# Altium PCB FPC-v4.2.PcbDoc
Units mil, origin at the board's own origin, x right, y up, seen from the top; angles counter-clockwise.
Board outline 1191.42 x 2806.71 mil, 2 copper layers (Top Layer, Bottom Layer); 1 components, 6 nets, 17 pads, 0 vias.
Unrouted connection lines stored in the file: 9.
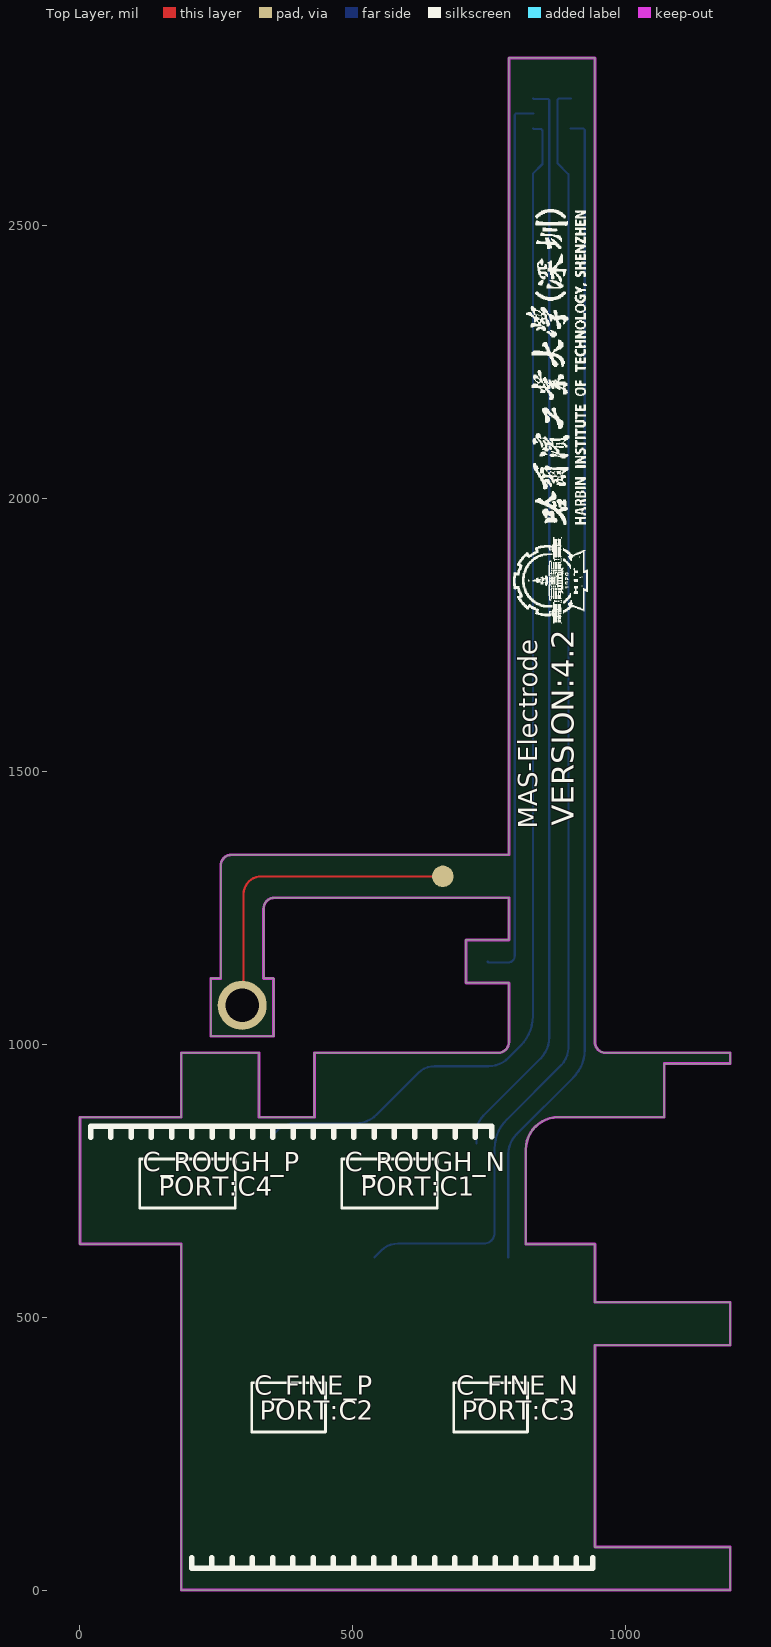
[diagram p0: Top Layer view]
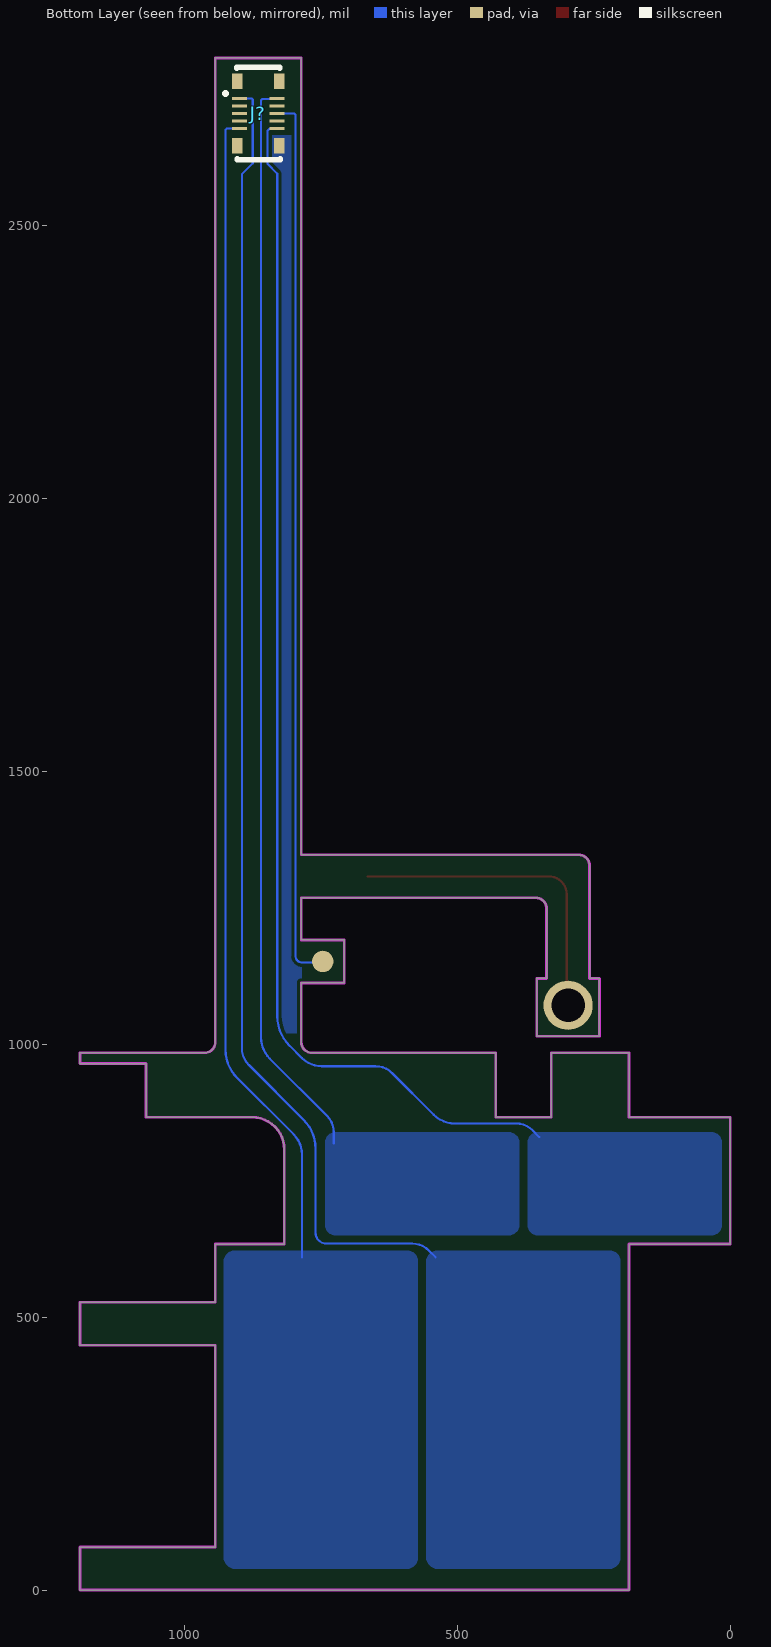
[diagram p1: Bottom Layer view, seen from below]

## Layer stack, top to bottom
Top Solder: solder mask 0.4, Solder Resist, Dk 3.5
Top Layer: signal copper 1.4
Dielectric 1: dielectric 12.6, FR-4, Dk 4.8
Bottom Layer: signal copper 1.4
Bottom Solder: solder mask 0.4, Solder Resist, Dk 3.5

## Board outline
0.25,634.11 185.78,634.11 185.78,0.25 1191.67,0.25 1191.67,78.99 943.64,78.99 943.64,448.65 1191.67,448.65 1191.67,527.39 943.64,527.39 943.64,634.11 817.16,634.11 817.16,807.34 cw(c876.22,807.34) 876.22,866.39 1070.52,866.39 1070.52,964.82 1191.67,964.82 1191.67,984.5 963.32,984.5 cw(c963.32,1004.19) 943.64,1004.19 943.64,2806.96 786.16,2806.96 786.16,1347.08 277.7,1347.08 ccw(c277.7,1327.39) 258.02,1327.39 258.02,1120.7 240,1120.7 240,1015 355,1015 355,1120.7 336.76,1120.7 336.76,1248.65 cw(c356.44,1248.65) 356.44,1268.34 786.16,1268.34 786.16,1191.19 707.42,1191.19 707.42,1112.45 786.16,1112.45 786.16,1004.19 cw(c766.47,1004.19) 766.47,984.5 429.97,984.5 429.97,866.39 328.39,866.39 328.39,984.5 185.78,984.5 185.78,866.39 0.25,866.39

## Design rules (kind name [scope] priority, off if disabled: settings)
Clearance [All] p1: gap=6 ignorepadtopadclearanceinfootprint=FALSE
PlaneConnect [All] p1: planeconnectstyle=Direct reliefexpansion=20 reliefentries=4 reliefconductorwidth=10 reliefairgap=10
PolygonConnect [All] p1: connectstyle=Direct reliefconductorwidth=10 reliefentries=4 polygonreliefangle="90 Angle" airgapwidth=10
RoutingVias [All] p1: holewidth=28 width=50 viastyle="Through Hole" minholewidth=28 minwidth=50 maxholewidth=28 maxwidth=50
SolderMaskExpansion [All] p1: expansion=4 istentingtop=FALSE
Width [All] p1: maxlimit=10 minlimit=4 preferedwidth=4
29 further rules are at their usual default settings.

## Components (designator, comment, footprint, x,y, rotation, side; value= is the part's Value field where it differs from the comment)
J? "BM24-10DP/2-0.35V(51)" CONN-SMD_BM24-10DP-2-0.35V-51 865,2705 r270 bottom

## Footprints (in the part's own frame and the unit in brackets; to place one, negate y for a bottom-side part, rotate by r counter-clockwise, add the part's x,y. Pads: shape width x height; smd on the part's side, far side on the other; paste and mask are expansions set on the pad)
CONN-SMD_BM24-10DP-2-0.35V-51 [mm] "板对板连接器"
  rect 0.15x0.69 smd: 1(-0.7,-0.875) 2(-0.35,-0.875) 3(0,-0.875) 4(0.35,-0.875) 5(0.7,-0.875) 6(0.7,0.875) 7(0.35,0.875) 8(0,0.875) 9(-0.35,0.875) 10(-0.7,0.875)
  rect 0.73x0.49 smd: 11(1.5,0.975) 12(1.5,-0.975) 13(-1.5,-0.975) 14(-1.5,0.975)
  silkscreen extent -2.16,-1.55 2.16,1.02, body extent -2.17,-1 2.15,1.02, height 0.64

## Part data
J?: "板对板连接器", Current Rating (Max)=5A, JLCPCB Part Class="Extended Part", LCSC Part Name=BTB板对板,BM24系列,0.35间距,10PIN公座, Manufacturer=HRS(广濑), Operating Temperature Range=-40℃~+85℃, Add into BOM=yes, Convert to PCB=yes, Device=BM24-10DP/2-0.35V(51), Gender=公, Manufacturer Part=BM24-10DP/2-0.35V(51), Mounting Style=立贴, Name=BM24-10DP/2-0.35V(51), Number of Pins=10, Number of Rows=2, Pitch=0.35mm, Supplier=LCSC, Supplier Footprint=SMD,P=0.35mm, Supplier Part=C424554, Symbol=BM24-10DP/2-0.35V(51)

## Free pads (board coordinates)
  round 90 hole 61.02: 1(297.39,1071.49)
  round 39.37 smd: 1(665.1,1307.71)
  round 39.37 smd far side: 1(746.79,1151.82)

## Nets (pads, with @x,y where several pads share a name; then routed paths per layer and width w, separated by ;. In a path a pad name is that pad's centre, name@x,y a point inside that pad or via, vN(x,y) a via of type N, cw(c..) or ccw(c..) an arc to the next point about the centre after c; other vN are vias at no path point)
C1: J?.10 | length 1992.3
  Bottom Layer w4: 726.59,818.83 726.59,838.83 cw(c769.46,838.83) 739.17,869.17 843.79,973.79 ccw(c804.64,1012.93) 860,1012.93 860,2729.26 857.66,2731.6 831.5,2731.6 J?.10
C2: J?.1 | length 2399.6
  Bottom Layer w4: 540,610 552.5,622.5 cw(c582.68,592.32) 582.68,635 740,635 ccw(c740,655) 760,655 760,808.91 cw(c835.07,808.91) 781.95,861.95 881.99,961.99 ccw(c850.57,993.4) 895,993.4 895,2593.71 875,2613.71 875,2730.21 877.34,2732.55 J?.1
C3: J?.5 | length 2144.3
  Bottom Layer w4: 785,610 785,798.79 cw(c836.21,798.79) 799.99,834.99 903.79,938.79 ccw(c852.57,990) 925,990 925,2675.09 922.66,2677.43 J?.5
C4: J?.6 | length 2227.3
  Bottom Layer w4: 350,830 362.5,842.5 cw(c392.68,812.32) 392.68,855 505,855 ccw(c505,909.32) 543.39,870.89 620.13,947.63 cw(c650,917.75) 650,960 748.79,960 ccw(c748.79,1011.21) 784.99,974.99 807.5,997.5 ccw(c753.18,1051.82) 830,1051.82 830,2595 847.77,2612.77 847.77,2674.14 845.43,2676.48 831.5,2676.48 J?.6
GND: J?.8 pad.1 | length 2221.9
  Top Layer w4: pad.1@297.39,1071.49 ccw(c297.39,1074.1) 300,1074.1 300,1275 cw(c332.71,1275) 332.71,1307.71 pad.1@665.1,1307.71
  Bottom Layer w4: pad.1@746.79,1151.82 748.61,1150 785,1150 ccw(c785,1161.66) 796.66,1161.66 796.66,2702.65 799,2704.99 J?.8
GP: J?.2 J?.3 J?.4 J?.7 J?.9 J?.11 J?.12 J?.13 J?.14

## Polygon pours and split planes (outlines as drawn)
GP on Bottom Layer "NONET_L01_P-001" (solid, remove dead copper, pour order 4): 785,2665 855,2665 855,1020 785,1020
C4 on Bottom Layer "NONET_L01_P-001" (solid, pour order 2): 35.68,649.86 cw(c35.68,669.54) 16,669.54 16,819.15 cw(c35.68,819.15) 35.68,838.83 351.62,838.83 cw(c351.62,819.15) 371.31,819.15 371.31,669.54 cw(c351.62,669.54) 351.62,649.86
C2 on Bottom Layer "NONET_L01_P-001" (solid, pour order 0): 201.53,59.31 201.53,602.61 cw(c221.21,602.61) 221.21,622.3 537.15,622.3 cw(c537.15,602.61) 556.83,602.61 556.83,59.31 cw(c537.15,59.31) 537.15,39.62 221.21,39.62 cw(c221.21,59.31)
C3 on Bottom Layer "NONET_L01_P-001" (solid, pour order 1): 572.58,59.31 ccw(c592.27,59.31) 592.27,39.62 908.2,39.62 ccw(c908.2,59.31) 927.89,59.31 927.89,602.61 ccw(c908.2,602.61) 908.2,622.3 592.27,622.3 ccw(c592.27,602.61) 572.58,602.61
C1 on Bottom Layer "NONET_L01_P-001" (solid, pour order 3): 387.05,669.54 387.05,819.15 cw(c406.74,819.15) 406.74,838.83 722.68,838.83 cw(c722.68,819.15) 742.36,819.15 742.36,669.54 cw(c722.68,669.54) 722.68,649.86 406.74,649.86 cw(c406.74,669.54)

## Keep-outs
Keep-Out Layer:
  lines w5: 0.25,634.11 0.25,866.39 185.78,866.39 185.78,984.5 328.39,984.5 328.39,866.39 429.97,866.39 429.97,984.5 766.47,984.5 ccw(c766.47,1004.19) 786.16,1004.19 786.16,1112.45 707.42,1112.45 707.42,1191.19 786.16,1191.19 786.16,1268.34 356.44,1268.34 ccw(c356.44,1248.65) 336.76,1248.65 336.76,1120.7 355,1120.7 355,1015 240,1015 240,1120.7 258.02,1120.7 258.02,1327.39 cw(c277.7,1327.39) 277.7,1347.08 786.16,1347.08 786.16,2806.96 943.64,2806.96 943.64,2610.11 943.64,1004.19 ccw(c963.32,1004.19) 963.32,984.5 1191.67,984.5 1191.67,964.82 1070.52,964.82 1070.52,866.39 876.22,866.39 ccw(c876.22,807.34) 817.16,807.34 817.16,634.11 943.64,634.11 943.64,602.61 943.64,527.39 1191.67,527.39 1191.67,448.65 943.64,448.65 943.64,78.99 1191.67,78.99 1191.67,0.25 994.82,0.25 185.78,0.25 185.78,634.11 0.25,634.11

## Silkscreen, mask and mechanical layers (free items; w line width, h text height)
Top Overlay:
  drawing of 291 lines, arcs and shapes, not listed
  text "VERSION:4.2" at 918.93,1400.05 h70 r90
  text "MAS-Electrode" at 850,1395 h60 r90
  text "C_ROUGH_P" at 115,755.87 h60
  text "C_ROUGH_N" at 485,755.87 h60
  text "PORT:C4" at 145,710.29 h60
  text "PORT:C1" at 515,710.29 h60
  text "C_FINE_P" at 320,345.87 h60
  text "C_FINE_N" at 690,345.87 h60
  text "PORT:C2" at 330,300.29 h60
  text "PORT:C3" at 700,300.29 h60
Mechanical 1:
  circle w0.5: c746.79,1151.82 r19.68
  circle w0.5: c665.1,1307.71 r19.68
  circle w0.5: c297.39,1071.49 r29.53
  lines w0.5: 0.25,634.11 0.25,866.39 185.78,866.39 185.78,984.5 328.39,984.5 328.39,866.39 429.97,866.39 429.97,984.5 766.47,984.5 ccw(c766.47,1004.19) 786.16,1004.19 786.16,1112.45 707.42,1112.45 707.42,1191.19 786.16,1191.19 786.16,1268.34 356.44,1268.34 ccw(c356.44,1248.65) 336.76,1248.65 336.76,1120.7 355,1120.7 355,1015 240,1015 240,1120.7 258.02,1120.7 258.02,1327.39 cw(c277.7,1327.39) 277.7,1347.08 786.16,1347.08 786.16,2806.96 943.64,2806.96 943.64,2610.11 943.64,1004.19 ccw(c963.32,1004.19) 963.32,984.5 1191.67,984.5 1191.67,964.82 1070.52,964.82 1070.52,866.39 876.22,866.39 ccw(c876.22,807.34) 817.16,807.34 817.16,634.11 943.64,634.11 943.64,602.61 943.64,527.39 1191.67,527.39 1191.67,448.65 943.64,448.65 943.64,78.99 1191.67,78.99 1191.67,0.25 994.82,0.25 185.78,0.25 185.78,634.11 0.25,634.11
  lines w10: 707.42,1112.45 786.16,1112.45 786.16,1191.19 707.42,1191.19 707.42,1112.45 ; 786.16,2600 945,2600 945,2806.96 786.16,2806.96 786.16,2600
  lines w15: 647.5,1145 682.5,1145 ; 672.5,1160 682.5,1145 ; 717.5,2665 752.5,2665 ; 742.5,2680 752.5,2665 ; 682.5,1145 672.5,1130 682.5,1145 ; 752.5,2665 742.5,2650 752.5,2665
  text "1.客编放在底层" at 1137.5,2795.32 h60
  text "①" at 639.92,2645.41 h60
  text "2.补强说明： / ①②箭头所指框选区域顶层PI补强" at 1137.5,2645 h60
  text "②" at 569.92,1125.41 h60